# Altium PCB shieldMegaEstacionTT.PcbDoc
Units mil, origin at the board's own origin, x right, y up, seen from the top; angles counter-clockwise.
Board outline 3937 x 4724 mil, 2 copper layers (Top Layer, Bottom Layer); 68 components, 76 nets, 317 pads, 48 vias.
Unrouted connection lines stored in the file: 2.
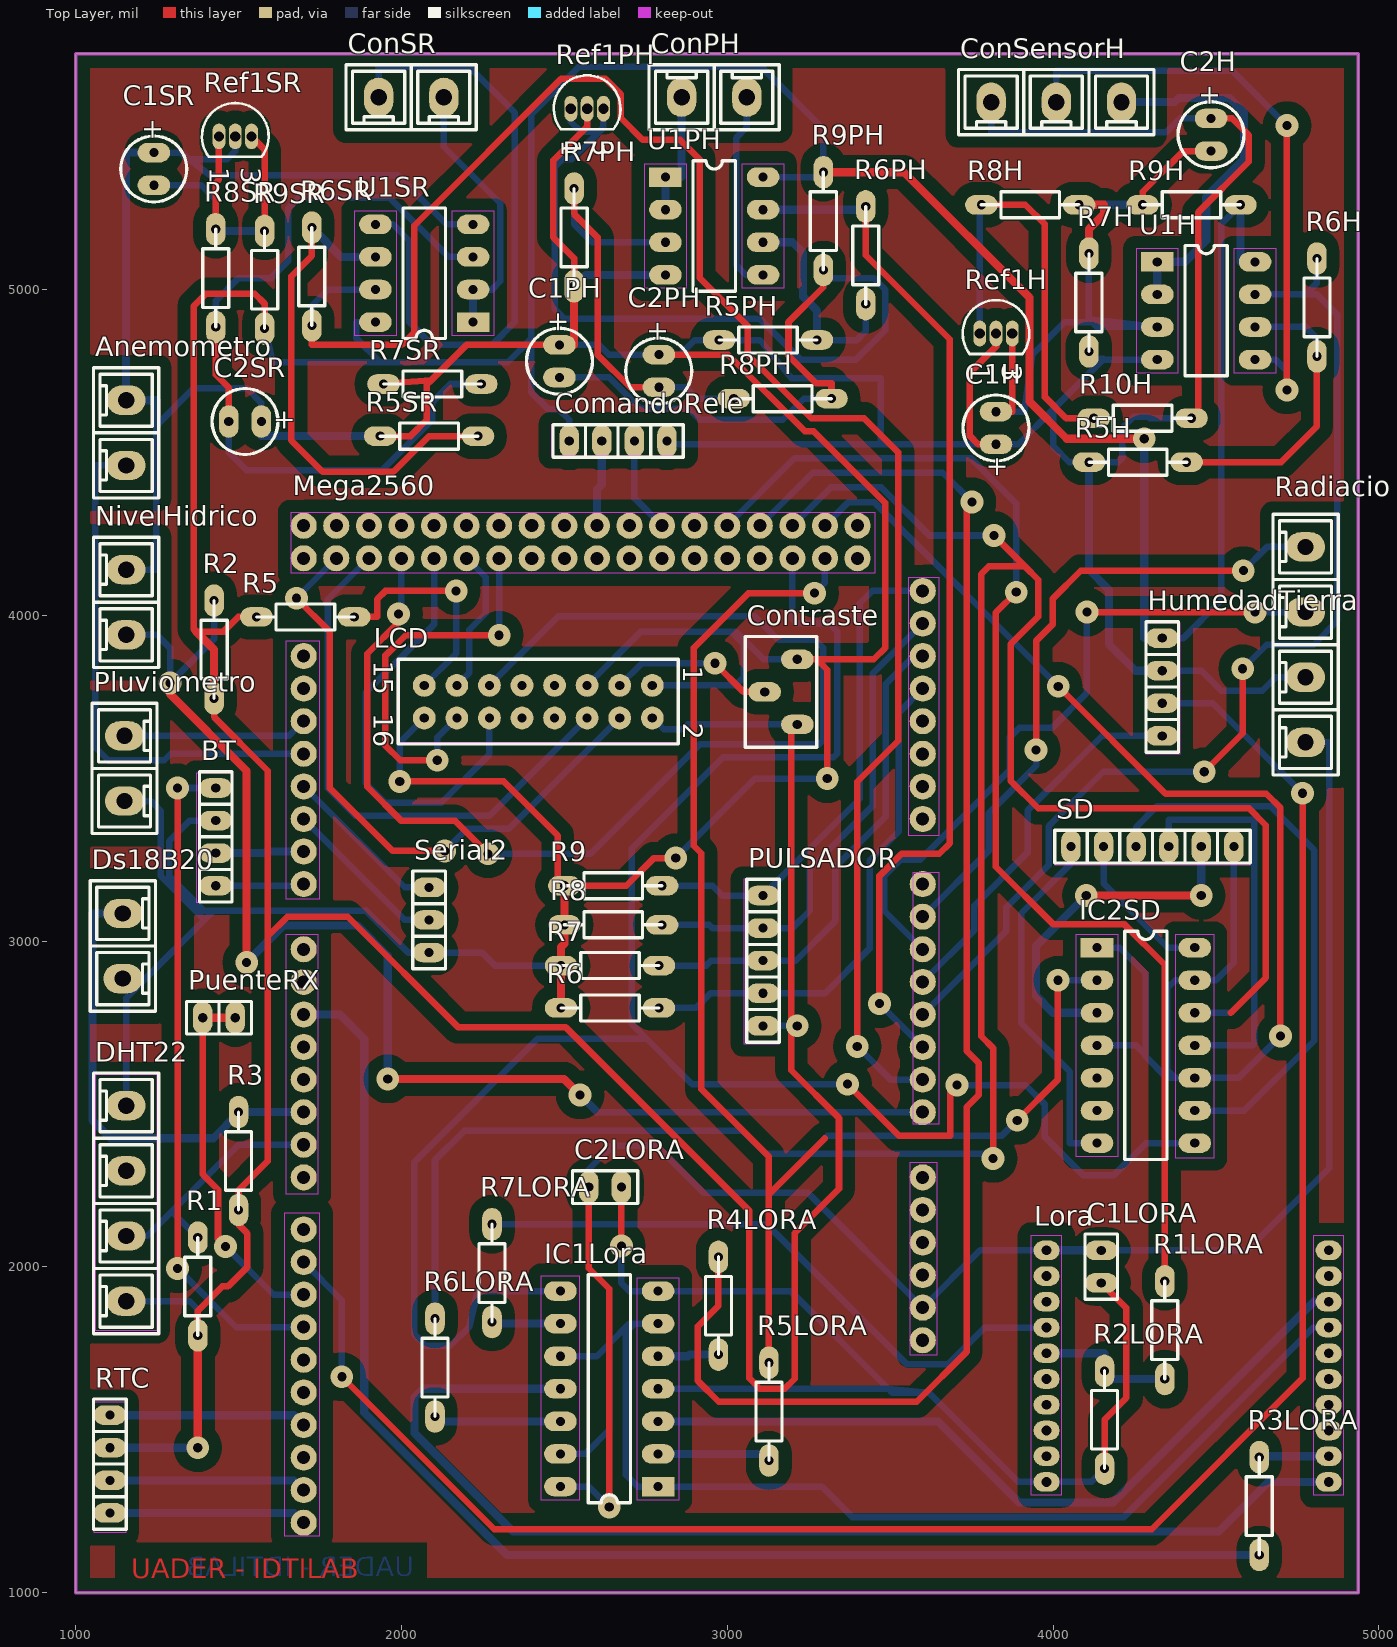
[diagram p0: Top Layer view]
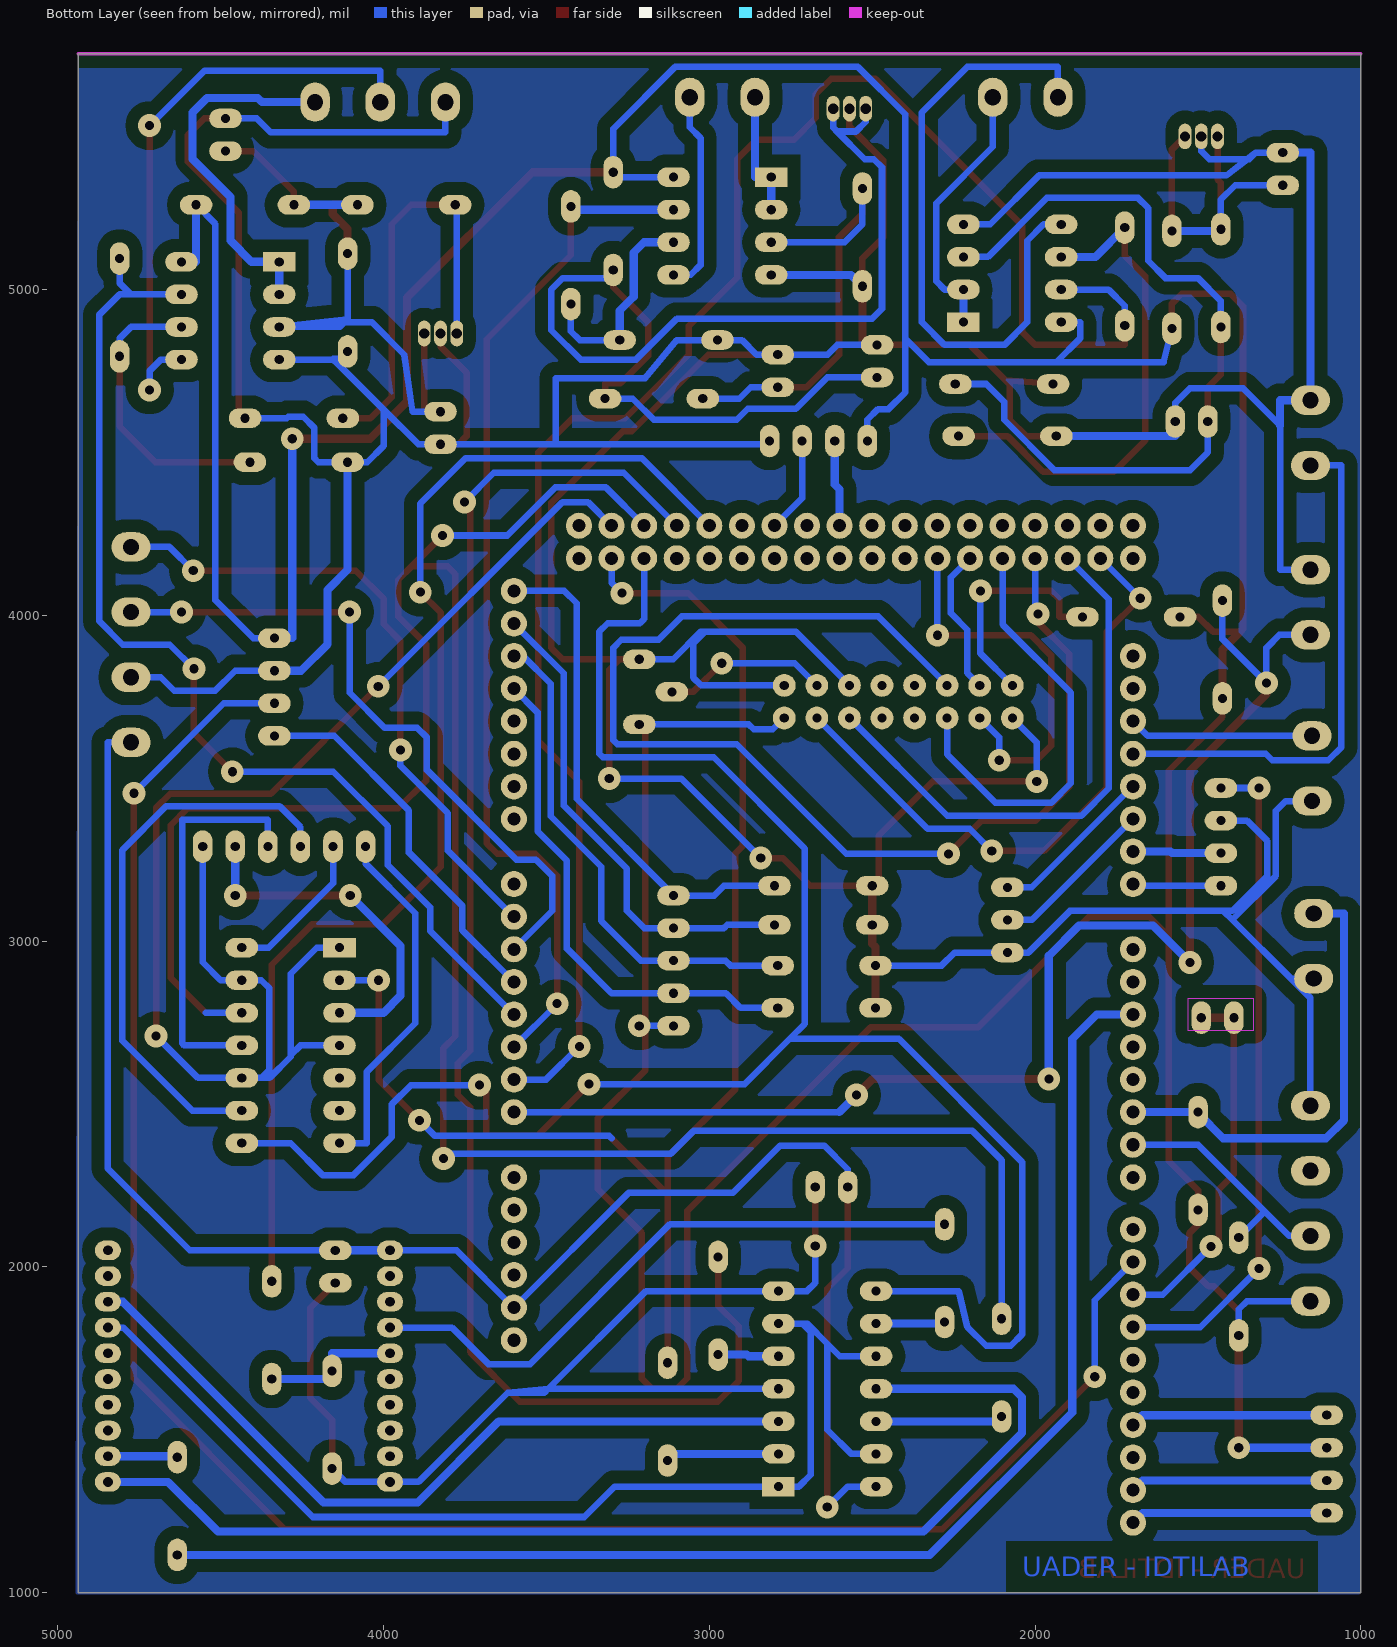
[diagram p1: Bottom Layer view, seen from below]

## Layer stack, top to bottom
Top Solder: solder mask 0.4, Solder Resist, Dk 3.5
Top Layer: signal copper 1.4
Dielectric 1: dielectric 12.6, FR-4, Dk 4.8
Bottom Layer: signal copper 1.4
Bottom Solder: solder mask 0.4, Solder Resist, Dk 3.5

## Board outline
1000,1000 1000,5724 4937,5724 4937,1000

## Design rules (kind name [scope] priority, off if disabled: settings)
Clearance [All] p1: gap=20
PolygonConnect [All] p1: connectstyle=Relief reliefconductorwidth=10 reliefentries=4 polygonreliefangle="90 Angle" airgapwidth=10
RoomDefinition SensorRadiacion [InComponentClass('SensorRadiacion')] p1: confinementstyle=ConfineIn formatcopy=TRUE lockcomponents=FALSE outline 4937,1000 4937,5730 1000,5730 1000,1000
RoomDefinition SensorPH [InComponentClass('SensorPH')] p2: confinementstyle=ConfineIn formatcopy=TRUE lockcomponents=FALSE outline 990,5740 990,980 4960,980 4960,5740
RoomDefinition SensorHumedadBueno [InComponentClass('SensorHumedadBueno')] p3: confinementstyle=ConfineIn formatcopy=TRUE lockcomponents=FALSE outline 4960,1000 4960,5735 970,5735 970,1000
RoomDefinition SD [InComponentClass('SD')] p4: confinementstyle=ConfineIn formatcopy=TRUE lockcomponents=FALSE outline 4960,1000 4960,5724 980,5724 980,1000
RoomDefinition LORA [InComponentClass('LORA')] p5: confinementstyle=ConfineIn formatcopy=TRUE lockcomponents=FALSE outline 980,986 4937,986 4937,5715 980,5715
RoomDefinition shieldMegaEstacionTT [InComponentClass('shieldMegaEstacionTT')] p6: confinementstyle=ConfineIn formatcopy=TRUE lockcomponents=FALSE outline 990,1010 4950,1010 4950,5735 990,5735
RoutingVias [All] p1: holewidth=28 width=70 viastyle="Through Hole" minholewidth=28 minwidth=70 maxholewidth=28 maxwidth=70
SolderMaskExpansion [All] p1: expansion=4
Width [All] p1: maxlimit=60 minlimit=20 preferedwidth=20 minimp=50.000000 maximp=50.000000 favimp=50.000000 checkconnectedcopper=TRUE
30 further rules are at their usual default settings.

## Classes and differential pairs
component class SensorRadiacion: C1SR C2SR ConSR R5SR R6SR R7SR R8SR R9SR Ref1SR U1SR
component class SensorPH: C1PH C2PH ConPH R5PH R6PH R7PH R8PH R9PH Ref1PH U1PH
component class SensorHumedadBueno: C1H C2H ConSensorH R5H R6H R7H R8H R9H R10H Ref1H U1H
component class SD: IC2SD SD
component class LORA: C1LORA C2LORA IC1Lora Lora R1LORA R2LORA R3LORA R4LORA R5LORA R6LORA R7LORA
component class shieldMegaEstacionTT: Anemometro BT ComandoRele Contraste DHT22 Ds18B20 HumedadTierra LCD Mega2560 NivelHidrico Pluviometro PuenteRX PULSADOR R1 R2 R3 R5 R6 R7 R8 R9 RadiacionViejo RTC Serial2

## Components (designator, comment, footprint, x,y, rotation, side; value= is the part's Value field where it differs from the comment)
Anemometro "Int5" "BORNERA2 - T" 1155,4460 r90 top
BT "CON4" CON4 1430,3470 r270 top
C1H "1uF" CAPPOL100 3825,4525 r90 top
C1LORA "0,1uF" CAP100 4148,1951 r90 top
C1PH "1uF" CAPPOL100 2485,4830 r270 top
C1SR "1uF" CAPPOL100 1240,5420 r270 top
C2H "1uF" CAPPOL100 4485,5525 r270 top
C2LORA "0,1uF" CAP100 2675,2245 r180 top
C2PH "1uF" CAPPOL100 2790,4800 r270 top
C2SR "1uF" CAPPOL100 1570,4595 r180 top
ComandoRele "CON4" CON4 2515,4535 r0 top
ConPH "CON2" "BORNERA2 - T" 2860,5590 r0 top
ConSensorH "CON3" "BORNERA3 - T" 4210,5575 r180 top
ConSR "CON2" "BORNERA2 - T" 2130,5590 r180 top
Contraste "POT" PRESET2 3215,3665 r90 top
DHT22 "Vcc-D-n-Gnd" BORNERA4 1155,1895 r90 top
Ds18B20 "CON2" "BORNERA2 - T" 1145,3085 r270 top
HumedadTierra "A-D-Gnd-Vcc" CON4 4335,3630 r90 top
IC1Lora "74HC125" DIP14B 2788,1326 r180 top
IC2SD "74HC125" DIP14B 4135,2980 r0 top
LCD "CON16" CON2X8 2770,3785 r270 top
Lora "LORA BEE" LORABEE 4413,1656 r0 top
Mega2560 "Shield MEGA" "Shield Mega" 6700,475 r90 top
NivelHidrico "A0" "BORNERA2 - T" 1155,3940 r90 top
Pluviometro "Int4" "BORNERA2 - T" 1150,3630 r270 top
PuenteRX "CON2" CON2 1490,2765 r180 top
PULSADOR "CON5" CON5 3110,3140 r270 top
R1 "10K" RES300 1375,1790 r90 top
R1LORA "1K" RES300 4343,1656 r90 top
R2 "220" RES300 1425,3745 r90 top
R2LORA "2k2" RES300 4158,1381 r90 top
R3 "4k7" RES300 1500,2175 r90 top
R3LORA "3k3" RES300 4633,1416 r270 top
R4LORA "3k3" RES300 2973,1731 r90 top
R5 "680" RES300 1555,3995 r0 top
R5H "10K" RES300 4110,4470 r0 top
R5LORA "3k3" RES300 3128,1406 r90 top
R5PH "10K" RES300 2975,4845 r0 top
R5SR "10K" RES300 1935,4550 r0 top
R6 "10K" RES300 2490,2795 r0 top
R6H "22K" RES300 4810,5095 r270 top
R6LORA "3k3" RES300 2103,1841 r270 top
R6PH "22K" RES300 3425,5255 r270 top
R6SR "22K" RES300 1725,4890 r90 top
R7 "10K" RES300 2490,2925 r0 top
R7H "10K" RES300 4110,4810 r90 top
R7LORA "3k3" RES300 2278,1831 r90 top
R7PH "10K" RES300 2530,5010 r90 top
R7SR "10K" RES300 1945,4710 r0 top
R8 "10K" RES300 2500,3050 r0 top
R8H "1K" RES300 3780,5260 r0 top
R8PH "10K" RES300 3020,4665 r0 top
R8SR "10K" RES300 1430,4885 r90 top
R9 "10K" RES300 2500,3170 r0 top
R9H "1K" RES300 4275,5260 r0 top
R9PH "1K" RES300 3295,5060 r90 top
R9SR "1K" RES300 1580,5180 r270 top
R10H "2K2" RES300 4425,4605 r180 top
RadiacionViejo "CON4" "BORNERA4 - T" 4775,3610 r90 top
Ref1H "TL431ACLP" LP03 3825,4865 r270 top
Ref1PH "TL431ACLP" LP03 2570,5555 r270 top
Ref1SR "TL431ACLP" LP03 1490,5470 r270 top
RTC "Scl-Sda-Vcc-Gnd" CON4 1105,1245 r90 top
SD "Gnd-Vcc-Miso-Mosi-Sck-Cs" CON6 4055,3290 r0 top
Serial2 "CON3" CON3 2085,3165 r270 top
U1H "MCP6002-E/P" DIP8B 4320,5085 r0 top
U1PH "MCP6002-E/P" DIP8B 2810,5345 r0 top
U1SR "MCP6002-E/P" DIP8B 2220,4900 r180 top

## Footprints (in the part's own frame and the unit in brackets; to place one, negate y for a bottom-side part, rotate by r counter-clockwise, add the part's x,y. Pads: shape width x height; smd on the part's side, far side on the other; paste and mask are expansions set on the pad)
"BORNERA2 - T" [mil] "Top Layer bloqueada"
  oval 90x120 hole 50: 1(0,0) 2(200,0)
  Top Layer keep-out region: -100,-100 300,-100 300,100 -100,100
  silkscreen extent -100,-100 300,100
"BORNERA3 - T" [mil] "Top layer bloqueada"
  oval 90x120 hole 50: 1(0,0) 2(200,0) 3(400,0)
  Top Layer keep-out region: -100,-100 500,-100 500,100 -100,100
  silkscreen extent -100,-100 500,100
BORNERA4 [mil]
  oval 90x120 hole 50: 1(0,0) 2(200,0) 3(400,0) 4(600,0)
  silkscreen extent -100,-100 700,100
"BORNERA4 - T" [mil] "Top layer bloqueada"
  oval 90x120 hole 50: 1(0,0) 2(200,0) 3(400,0) 4(600,0)
  Top Layer keep-out region: -100,-100 700,-100 700,100 -100,100
  silkscreen extent -100,-100 700,100
CAP100 [mil]
  oval 60x100 hole 28: 1(0,0) 2(100,0)
  silkscreen extent -50,-50 150,50
CAPPOL100 [mil]
  oval 60x100 hole 28: 1(0,0) 2(100,0)
  silkscreen extent -51,-101 151,101
CON2 [mil]
  oval 60x100 hole 28: 1(0,0) 2(100,0)
  silkscreen extent -50,-50 150,50
CON2X8 [mil]
  round 70 hole 28: 1(0,0) 2(100,0) 3(0,-100) 4(100,-100) 5(0,-200) 6(100,-200) 7(0,-300) 8(100,-300) 9(0,-400) 10(100,-400) 11(0,-500) 12(100,-500) 13(0,-600) 14(100,-600) 15(0,-700) 16(100,-700)
  silkscreen extent -80,-780 180,80
CON3 [mil]
  oval 60x100 hole 28: 1(0,0) 2(100,0) 3(200,0)
  silkscreen extent -50,-50 250,50
CON4 [mil]
  oval 60x100 hole 28: 1(0,0) 2(100,0) 3(200,0) 4(300,0)
  silkscreen extent -50,-50 350,50
CON5 [mil]
  oval 60x100 hole 28: 1(0,0) 2(100,0) 3(200,0) 4(300,0) 5(400,0)
  silkscreen extent -50,-50 450,50
CON6 [mil]
  oval 60x100 hole 28: 1(0,0) 2(100,0) 3(200,0) 4(300,0) 5(400,0) 6(500,0)
  silkscreen extent -50,-50 550,50
DIP8B [mil] "Top layer bloqueada"
  rect 100x60 hole 28: 1(0,0)
  oval 100x60 hole 28: 2(0,-100) 3(0,-200) 4(0,-300) 5(300,-300) 6(300,-200) 7(300,-100) 8(300,0)
  Top Layer keep-out region: -65,-340 65,-340 65,40 -65,40
  Top Layer keep-out region: 235,-340 365,-340 365,40 235,40
  silkscreen extent 85,-350 215,50
DIP14B [mil] "DIP14 con top layer bloqueado"
  rect 100x60 hole 28: 1(0,0)
  oval 100x60 hole 28: 2(0,-100) 3(0,-200) 4(0,-300) 5(0,-400) 6(0,-500) 7(0,-600) 8(300,-600) 9(300,-500) 10(300,-400) 11(300,-300) 12(300,-200) 13(300,-100) 14(300,0)
  Top Layer keep-out region: -65,-640 65,-640 65,40 -65,40
  Top Layer keep-out region: 240,-645 360,-645 360,40 240,40
  silkscreen extent 85,-650 215,50
LORABEE [mil] "Top Layer Bloqueada"
  oval 80x60 hole 30: 1(-433,395) 2(-433,316) 3(-433,237) 4(-433,158) 5(-433,79) 6(-433,0) 7(-433,-79) 8(-433,-158) 9(-433,-237) 10(-433,-316) 11(433,-316) 12(433,-237) 13(433,-158) 14(433,-79) 15(433,0) 16(433,79) 17(433,158) 18(433,237) 19(433,316) 20(433,395)
  Top Layer keep-out region: 385,-355 480,-355 480,440 385,440
  Top Layer keep-out region: -481,-355 -386,-355 -386,440 -481,440
LP03 [mm] "TO, Flat Index; 3 In-Line, Axial Leads; Body Dia. 4.8mm; Leads 0.56 x 0.41 mm (max)"
  oval 2x1 hole 0.8: 1(0,-1.27) 2(0,0) 3(0,1.27)
  silkscreen extent -2.6,-2.6 1.6,2.6
PRESET2 [mil]
  oval 60x100 hole 28: 1(0,0) 2(200,0) 3(100,100)
  silkscreen extent -70,-60 270,160
RES300 [mil]
  oval 100x60 hole 28: 1(0,0) 2(300,0)
  silkscreen extent 0,-40 300,40
"Shield Mega" [mil]
  round 80 hole 40: 0(2500,5000) 1(2400,5000) 2(2300,5000) 3(2200,5000) 3V3(1400,3100) 4(2100,5000) 5(2000,5000) 5V(1500,3100) 6(1900,5000) 7(1800,5000) 8(1640,5000) 9(1540,5000) 10(1440,5000) 11(1340,5000) 12(1240,5000) 13(1140,5000) 14(2700,5000) 15(2800,5000) 16(2900,5000) 17(3000,5000) 18(3100,5000) 19(3200,5000) 20(3300,5000) 21(3400,5000) 22(3700,4900) 23(3800,4900) 24(3700,4800) 25(3800,4800) 26(3700,4700) 27(3800,4700) 28(3700,4600) 29(3800,4600) 30(3700,4500) 31(3800,4500) 32(3700,4400) 33(3800,4400) 34(3700,4300) 35(3800,4300) 36(3700,4200) 37(3800,4200) 38(3700,4100) 39(3800,4100) 40(3700,4000) 41(3800,4000) 42(3700,3900) 43(3800,3900) 44(3700,3800) 45(3800,3800) 46(3700,3700) 47(3800,3700) 48(3700,3600) 49(3800,3600) 50(3700,3500) 51(3800,3500) 52(3700,3400) 53(3800,3400) A0(2000,3100) A1(2100,3100) A2(2200,3100) A3(2300,3100) A4(2400,3100) A5(2500,3100) A6(2600,3100) A7(2700,3100) A8(2900,3100) A9(3000,3100) A10(3100,3100) A11(3200,3100) A12(3300,3100) A13(3400,3100) A14(3500,3100) A15(3600,3100) AREF(940,5000) GNDa(3700,3300) GNDb(3800,3300) GNDc(1600,3100) GNDd(1700,3100) GNDs(1040,5000) RESET(1300,3100) SCL(740,5000) SDA(840,5000) VCCa(3700,5000) VCCb(3800,5000) VIN(1800,3100)

## Part data
Anemometro NivelHidrico Pluviometro: library part CON2, "Conector 2"
BT ComandoRele RadiacionViejo: "Conector 4"
C1H C1LORA C1PH C1SR C2H C2LORA C2PH C2SR: library part CAP, "Capacitor"
ConPH ConSR Ds18B20 PuenteRX: "Conector 2"
ConSensorH Serial2: "Conector 3"
Contraste: "Potenciometro - Preset"
DHT22 HumedadTierra RTC: library part CON4, "Conector 4"
LCD: "Conector 16"
PULSADOR: "Conector 5"
R1 R1LORA R2 R2LORA R3 R3LORA R4LORA R5 R5H R5LORA R5PH R5SR R6 R6H R6LORA R6PH R6SR R7 R7H R7LORA R7PH R7SR R8 R8H R8PH R8SR R9 R9H R9PH R9SR R10H: library part RES, "Resistencia"
Ref1H Ref1PH Ref1SR: "Adjustable Precision Shunt Regulator"
SD: library part CON6, "Conector 6"
U1H U1PH U1SR: "1 MHz, Low-Power Operational Amplifier, 8-Pin PDIP, Extended Temperature"

## Via types
v1: diameter 70, hole 28, Top Layer to Bottom Layer, 48 vias

## Nets (pads, with @x,y where several pads share a name; then routed paths per layer and width w, separated by ;. In a path a pad name is that pad's centre, name@x,y a point inside that pad or via, vN(x,y) a via of type N, cw(c..) or ccw(c..) an arc to the next point about the centre after c; other vN are vias at no path point)
3V3: C1LORA.2 C2LORA.2 IC1Lora.14 Lora.1 Mega2560.3V3 RadiacionViejo.1 | length 5303.6
  Top Layer w20: C2LORA.2 2575,1996 2638,1933 v1(2638,1263)
  Bottom Layer w20: IC1Lora.14 2575,1326 v1(2638,1263) ; C2LORA.2 2575,2300 2647.5,2372.5 2782.5,2372.5 2928,2227 3248,2227 Mega2560.3V3 3776,2051 Lora.1 ; C1LORA.2 4595,2051 4847,2303 4847,3610 RadiacionViejo.1
  Bottom Layer w25: Lora.1 C1LORA.2
GND: C1LORA.1 C2LORA.1 IC1Lora.4 IC1Lora.7 Lora.10 R2LORA.1 | length 3508.3
  Top Layer w20: v1(2675,2064) C2LORA.1 ; C1LORA.1 4225,1874 4225,1598 4158,1531 R2LORA.1
  Bottom Layer w20: v1(2675,2064) 2675,1951 2700,1926 IC1Lora.7 3194,1926 3494,1626 ; IC1Lora.4 3494,1626 ; R2LORA.1 4117,1340 Lora.10 3893,1340 3619,1614 ; 3494,1626 3506,1614 3619,1614 ; 3494,1626 3619,1614
NetAnemometro_1: Anemometro.1 Mega2560.18 | length 1624.9
  Bottom Layer w20: Anemometro.1 1060,4460 1060,3595 1100,3555 1272,3555 1292,3575 Mega2560.18
NetBT_1: BT.1 Mega2560.11 | length 2053.6
  Top Layer w20: v1(1313,1995) v1(1313,3470)
  Bottom Layer w20: v1(1313,1995) 1493,1815 Mega2560.11 ; v1(1313,3470) BT.1
NetBT_3: BT.3 Mega2560.15 | length 272.1
  Bottom Layer w25: BT.3 1580,3270 1585,3275 Mega2560.15
NetBT_4: BT.4 Mega2560.14 | length 272.1
  Bottom Layer w20: BT.4 1695,3170 Mega2560.14
NetC1H_2: C1H.2 C2H.2 R7H.2 R8H.2 R9H.1 Ref1H.3 U1H.3 | length 2151.3
  Top Layer w20: C1H.2 3875,4625 Ref1H.3 ; R9H.1 4275,5300 4400,5425 C2H.2
  Top Layer w25: R8H.2 4156,5260 4156,5232 4110,5186 R7H.2
  Bottom Layer w20: C1H.2 3911,4625 3936,4800 4036,4900 4119,4900 ; R7H.2 4110,4909 ; 4110,4909 4119,4900 ; 4110,4909 U1H.3 4134,4885 4119,4900
  Bottom Layer w25: R8H.2 R9H.1
NetC1PH_2: C1PH.2 R8PH.2 R9PH.1 Ref1PH.1 Ref1PH.3 | length 3741.8
  Top Layer w20: R9PH.1 3295,5007 3188,4900 3188,4797 3272.77,4712.23 3320,4712.23 R8PH.2
  Bottom Layer w20: C1PH.2 2638,4730 2734,4634 2882,4634 2916,4600 3170,4600 3235,4665 R8PH.2 ; Ref1PH.1 2520,5515 2550,5485 2608,5485 ; Ref1PH.3 2620,5497 2608,5485 ; R9PH.1 3295,5035 3450,5035 3485,5000 3485,4875 3395,4785 3225,4785 3099,4911 2500,4911 2470,4941 2470,5375 2495,5400 2523,5400 2608,5485
NetC1SR_2: C1SR.2 R8SR.2 R9SR.1 Ref1SR.1 Ref1SR.3 | length 1049.9
  Top Layer w20: R8SR.2 1430,5328 1440,5338 Ref1SR.1 ; Ref1SR.3 1580,5430 R9SR.1
  Bottom Layer w20: C1SR.2 1386,5320 1430,5276 R8SR.2
  Bottom Layer w25: R8SR.2 1430,5180 R9SR.1
NetC2PH_2: C2PH.2 R7PH.2 R8PH.1 U1PH.3 | length 1426.5
  Top Layer w20: R7PH.2 2530,5232 2602,5160 2602,4800 2702,4700 C2PH.2
  Bottom Layer w20: R7PH.2 2530,5200 2585,5145 U1PH.3 ; C2PH.2 2873,4700 2908,4665 R8PH.1
NetC2SR_2: C2SR.2 R7SR.2 R8SR.1 U1SR.3 | length 2511.3
  Top Layer w20: R8SR.1 1430,4739 1470,4699 C2SR.2
  Bottom Layer w20: R8SR.1 1430,4965 1500,5035 1600,5035 1653,5088 1653,5250 1684,5281 1964,5281 2145,5100 U1SR.3 ; C2SR.2 1470,4500 1524,4446 1941,4446 2095,4600 2095,4655 2150,4710 R7SR.2
NetComandoRele_2: ComandoRele.2 Mega2560.39 | length 266.2
  Bottom Layer w25: Mega2560.39 2600,4387 2615,4402 ComandoRele.2
NetComandoRele_3: ComandoRele.3 Mega2560.43 | length 295.2
  Bottom Layer w20: ComandoRele.3 2715,4360 Mega2560.43
NetConPH_1: ConPH.1 U1PH.1 U1PH.2 | length 395
  Bottom Layer w25: U1PH.2 U1PH.1 2860,5345 ConPH.1
NetConPH_2: ConPH.2 U1PH.5 | length 624.1
  Bottom Layer w20: ConPH.2 3060,5498 3027,5465 3027,5075 3057,5045 U1PH.5
NetConSensorH_1: ConSensorH.1 U1H.1 U1H.2 | length 1117.6
  Bottom Layer w25: ConSensorH.1 4373.5,5575 4386,5587.5 4541.5,5587.5 4586,5543 4586,5400 4470,5284 4470,5150 4405,5085 U1H.1 U1H.2
NetConSensorH_2: ConSensorH.2 U1H.5 | length 1856.5
  Top Layer w20: v1(4718,4692) v1(4718,5503)
  Bottom Layer w20: ConSensorH.2 4010,5672 4549,5672 v1(4718,5503) ; U1H.5 4683,4785 4718,4750 v1(4718,4692)
NetConSR_1: ConSR.1 U1SR.1 U1SR.2 | length 830
  Bottom Layer w20: ConSR.1 2130,5438 2303,5265 2303,5025 2278,5000 U1SR.2
  Bottom Layer w25: U1SR.1 U1SR.2
NetConSR_2: ConSR.2 U1SR.5 | length 1968.7
  Bottom Layer w20: U1SR.5 1974,5200 2024,5150 2024,4900 2094,4830 2278,4830 2348,4900 2348,5543 2208,5683 1930,5683 ConSR.2
NetContraste_3: Contraste.3 LCD.3 | length 509.6
  Top Layer w20: v1(2962,3853) 3050,3765 Contraste.3
  Bottom Layer w20: LCD.3 2738,3853 v1(2962,3853)
NetDHT22_2: DHT22.2 Mega2560.6 R1.2 | length 774.1
  Bottom Layer w20: DHT22.2 1220,2095 1295,2170 ; R1.2 1295,2170 ; Mega2560.6 1500,2375 1295,2170
NetDs18B20_1: Ds18B20.1 Mega2560.5 R3.2 | length 1433.7
  Bottom Layer w25: Ds18B20.1 1052,3085 1052,2450 1107,2395 1423,2395 1500,2472 R3.2 Mega2560.5
NetHumedadTierra_1: HumedadTierra.1 Mega2560.A4 | length 1167.1
  Bottom Layer w20: Mega2560.A4 3757.86,3032.86 3757.86,3107.86 3921.96,3271.96 3921.96,3400.72 4151.24,3630 HumedadTierra.1
NetHumedadTierra_2: HumedadTierra.2 Mega2560.9 | length 6076.4
  Top Layer w20: v1(1817,1663) 2285,1195 4303,1195 4766,1658 v1(4766,3454)
  Bottom Layer w20: Mega2560.9 1817,1898 v1(1817,1663) ; HumedadTierra.2 4490,3730 v1(4766,3454)
NetIC1Lora_1: IC1Lora.1 IC1Lora.6 IC1Lora.10 IC1Lora.13 Lora.17 | length 3712.3
  Bottom Layer w20: IC1Lora.13 2564,1426 2638,1500 2638,1764 ; IC1Lora.10 2600,1726 2638,1764 ; IC1Lora.6 2715,1826 ; Lora.17 4799,1814 4217.5,1232.5 3384,1232.5 3290.5,1326 IC1Lora.1 2725,1326 2689,1362 2689,1800 2715,1826 ; 2638,1764 2700,1826 2715,1826
NetIC1Lora_2: IC1Lora.2 R5LORA.1 | length 360
  Bottom Layer w25: IC1Lora.2 3128,1426 R5LORA.1
NetIC1Lora_3: IC1Lora.3 Lora.18 | length 2415.9
  Bottom Layer w25: IC1Lora.3 3646.5,1526 3895,1277.5 4184.5,1277.5 4800,1893 Lora.18
NetIC1Lora_5: IC1Lora.5 R4LORA.1 | length 187.1
  Bottom Layer w25: IC1Lora.5 2880,1726 2885,1731 R4LORA.1
NetIC1Lora_8: IC1Lora.8 IC2SD.8 Mega2560.50 | length 6203.7
  Top Layer w20: v1(3369,2561) 3528,2402 3684,2402 3684,2537 v1(3705,2558)
  Bottom Layer w20: IC1Lora.8 2234,1926 2208,1816 2150,1758 2075,1758 2040,1793 2040,2322 2418,2700 2753,2700 ; Mega2560.50 3200,3989 3213,3976 3311.5,3976 3337.5,3950 3337.5,3575 3326.5,3564 2986.74,3564 2707,3284.26 2707,2746 2753,2700 ; v1(3369,2561) 2892,2561 2753,2700 ; v1(3705,2558) 3916,2558 3974,2500 3974,2400 4092,2282 4187,2282 4285,2380 IC2SD.8
NetIC1Lora_9: IC1Lora.9 R7LORA.1 | length 215
  Bottom Layer w25: R7LORA.1 2278,1826 IC1Lora.9
NetIC1Lora_11: IC1Lora.11 Lora.11 | length 3563.2
  Bottom Layer w25: IC1Lora.11 2066,1626 2040,1600 2040,1490 2342.5,1187.5 4508.5,1187.5 4661,1340 Lora.11
NetIC1Lora_12: IC1Lora.12 R6LORA.2 | length 400
  Bottom Layer w25: R6LORA.2 2103,1526 IC1Lora.12
NetIC2SD_1: IC2SD.1 IC2SD.4 IC2SD.10 IC2SD.13 Mega2560.53 SD.6 | length 4489.4
  Top Layer w20: v1(4016,3782) 4345.5,3452.5 4654.5,3452.5 4698,3409 v1(4698,2708.69)
  Bottom Layer w20: Mega2560.53 3372.5,4347.5 3450.5,4347.5 v1(4016,3782) ; IC2SD.4 4255,2680 4285,2650 ; IC2SD.1 4205,2980 4285,2900 4285,2650 ; SD.6 4555,2935 4500,2880 IC2SD.13 4375,2880 4350,2855 4350,2605 4375,2580 ; v1(4698,2708.69) 4569.31,2580 IC2SD.10 4375,2580 ; 4285,2650 4285,2645 4350,2580 4375,2580
NetIC2SD_2: IC2SD.2 Mega2560.52 R5LORA.2 | length 4308.3
  Top Layer w20: R5LORA.2 3128,2223 ; v1(3268,4068) 3065,4068 2897,3900 2897,3293 2920,3270 2920,2546 3128,2338 3128,2223 ; 3300,2395 3128,2223 ; v1(3890,2450) 4015,2575 v1(4015,2880)
  Bottom Layer w20: v1(3268,4068) 3300,4100 Mega2560.52 ; 3300,2395 3307,2402 3842,2402 v1(3890,2450) ; v1(4015,2880) IC2SD.2
NetIC2SD_3: IC2SD.3 SD.5 | length 1083.7
  Top Layer w25: v1(4102,3140) v1(4455,3140)
  Bottom Layer w25: v1(4102,3140) 3947.5,2985.5 3947.5,2832.5 4000,2780 IC2SD.3 ; v1(4455,3140) SD.5
NetIC2SD_9: IC2SD.9 SD.3 | length 1729.5
  Bottom Layer w20: SD.3 4255,3350 4319.43,3414.43 4666.57,3414.43 4801.5,3279.5 4801.5,2694.31 4587.19,2480 IC2SD.9
NetIC2SD_11: IC2SD.11 SD.4 | length 1218.5
  Bottom Layer w20: SD.4 4355,3373 4618,3373 4618,2686 4612,2680 IC2SD.11
NetIC2SD_12: IC2SD.12 Mega2560.51 R6LORA.1 | length 7368.9
  Top Layer w20: v1(3816,2333) 3816,2671.87 3779.5,2708.37 3779.5,4126.5 3803,4150 3914,4150 ; v1(3819,4245) 3914,4150 ; 4546,2780 4653,2887 4653,3356 4601.5,3407.5 3954.5,3407.5 3869.5,3492.5 3869.5,3911 3954.5,3996 3954.5,4109.5 3914,4150
  Bottom Layer w20: R6LORA.1 2103,2328 2192.5,2417.5 3048.5,2417.5 3118,2348 3801,2348 v1(3816,2333) ; Mega2560.51 3317.5,4392.5 3473,4392.5 3620.5,4245 v1(3819,4245) ; IC2SD.12 4546,2780
NetLCD_4: LCD.4 Mega2560.22 | length 1937.1
  Top Layer w20: v1(1677.5,4052.5) 1780,3950 1780,3470 1973,3277 v1(2133,3277)
  Bottom Layer w20: v1(1677.5,4052.5) Mega2560.22 ; v1(2133,3277) 2201,3345 2330,3345 LCD.4
NetLCD_6: LCD.6 Mega2560.24 | length 1713.2
  Bottom Layer w20: Mega2560.24 1774,4049 1774,3469 1858,3385 2270,3385 LCD.6
NetLCD_11: LCD.11 Mega2560.26 | length 3810.4
  Top Layer w20: v1(1991,4004) 1991,3978 1895,3882 1895,3474 2000,3369 2165,3369 v1(2266,3268)
  Bottom Layer w20: v1(1991,4004) 2000,4013 Mega2560.26 ; v1(2266,3268) 2580,3268 2916,3604 3282,3604 3295,3617 3295,3900 3270,3925 3156,3925 3084,3997 2482,3997 LCD.11
NetLCD_12: LCD.12 Mega2560.28 | length 1354.5
  Bottom Layer w20: Mega2560.28 2100,3972 1890.72,3762.72 1890.72,3484.28 1950,3425 2122,3425 2270,3573 LCD.12
NetLCD_13: LCD.13 Mega2560.30 | length 450.9
  Bottom Layer w20: LCD.13 2208,3823 2208,3955.87 2258.51,4006.38 2258.51,4116.49 Mega2560.30
NetLCD_14: LCD.14 Mega2560.32 | length 1220.1
  Top Layer w20: v1(2110,3555) 1996.03,3555 1951.03,3600 1951.03,3877.03 2013,3939 v1(2300,3939)
  Bottom Layer w20: v1(2110,3555) 2110,3625 LCD.14 ; v1(2300,3939) Mega2560.32
NetLCD_15: LCD.15 R5.2 | length 708.9
  Top Layer w20: R5.2 1926,3995 1926,4050 1951,4075 v1(2168,4075)
  Bottom Layer w20: LCD.15 2168,3883 v1(2168,4075)
NetLora_4: Lora.4 R7LORA.2 | length 1926.8
  Bottom Layer w20: R7LORA.2 2278,2131.5 3120.5,2131.5 3550,1702 3678,1702 3790,1814 Lora.4
NetLora_5: Lora.5 R1LORA.1 R2LORA.2 | length 442
  Bottom Layer w25: Lora.5 4158,1735 R2LORA.2 4158,1656 R1LORA.1
NetLora_12: Lora.12 R3LORA.1 | length 216
  Bottom Layer w25: R3LORA.1 4633,1419 Lora.12
NetMega2560_2: Mega2560.2 R3LORA.2 | length 4291.7
  Bottom Layer w25: Mega2560.2 1811,2775 1886,2700 1886,1553.64 2323.64,1116 R3LORA.2
NetMega2560_10: Mega2560.10 PuenteRX.1 PuenteRX.2 | length 1132.3
  Top Layer w20: PuenteRX.2 1390,2284 1437,2237 1437,2086 v1(1460,2063)
  Top Layer w25: PuenteRX.2 PuenteRX.1
  Bottom Layer w20: v1(1460,2063) 1608,1915 Mega2560.10
NetMega2560_16: Mega2560.16 Serial2.2 | length 513.4
  Bottom Layer w20: Mega2560.16 2010,3065 Serial2.2
NetMega2560_17: Mega2560.17 Serial2.1 | length 513.4
  Bottom Layer w20: Mega2560.17 2010,3165 Serial2.1
NetMega2560_19: Mega2560.19 Pluviometro.1 | length 568.6
  Bottom Layer w20: Pluviometro.1 1655,3630 Mega2560.19
NetMega2560_47: Mega2560.47 R1LORA.2 | length 3786.1
  Top Layer w20: v1(3887,4071) 3824.5,4008.5 3824.5,3228 4000,3052.5 4218,3052.5 4343,2927.5 R1LORA.2
  Bottom Layer w20: Mega2560.47 3207.5,4482.5 3747.5,4482.5 3887,4343 v1(3887,4071)
NetMega2560_49: Mega2560.49 R4LORA.2 | length 4724.2
  Top Layer w20: R4LORA.2 2973,1881 2910,1818 2910,1650 2974,1586 3581.5,1586 3734.5,1739 3734.5,2490.37 3772.5,2528.37 3772.5,2625.37 3734.5,2663.37 3734.5,4331.57 v1(3751,4348.07)
  Bottom Layer w20: Mega2560.49 3262.5,4437.5 3661.57,4437.5 v1(3751,4348.07)
NetMega2560_A0: Mega2560.A0 NivelHidrico.1 R2.2 | length 4104.4
  Top Layer w25: v1(1290,3792) 1290,3758 1525,3523 v1(1525,2934) ; v1(1958,2577) 2499,2577 v1(2548,2528)
  Bottom Layer w20: NivelHidrico.1 1250,3940 1290,3900 v1(1290,3792) 1425,3927 R2.2 ; 2601,2475 Mega2560.A0
  Bottom Layer w25: v1(1525,2934) 1638.5,3047.5 1865.5,3047.5 1958,2955 v1(1958,2577) ; v1(2548,2528) 2601,2475
NetMega2560_A1: Mega2560.A1 R6SR.1 U1SR.7 | length 5566.8
  Top Layer w20: R6SR.1 1725,4830 2000,4830 2039,4869 2039,5196 2490,5647 2626,5647 2673,5600 2673,5527 2740,5460 2855,5460 2915,5400 2915,5036 3063,4888 3063,4800 3258,4605 3420,4605 3525,4500 3525,3615 3399,3489 v1(3399,2677)
  Bottom Layer w20: R6SR.1 1725,4950 1775,5000 U1SR.7 ; v1(3399,2677) 3501,2575 Mega2560.A1
NetMega2560_A2: Mega2560.A2 R6PH.1 U1PH.7 | length 3224.4
  Top Layer w20: R6PH.1 3425,5105 3683,4847 3683,3300 3651,3268 3535,3268 3467,3200 v1(3467,2808)
  Bottom Layer w20: v1(3467,2808) Mega2560.A2
  Bottom Layer w25: U1PH.7 3425,5245 R6PH.1
NetMega2560_A3: Mega2560.A3 R6H.1 U1H.7 | length 3343.8
  Top Layer w20: v1(4464,3520) 4582,3638 v1(4582,3836)
  Bottom Layer w20: Mega2560.A3 3857,3032 3857,3103.64 3987,3233.64 3987,3353 4154,3520 v1(4464,3520) ; v1(4582,3836) 4656,3910 4800,3910 4873,3983 4873,4922 4810,4985 4775,4985 ; U1H.7 4775,4985 ; R6H.1 4810,5020 4775,4985
NetMega2560_A5: Mega2560.A5 RadiacionViejo.3 | length 2106.3
  Top Layer w20: v1(4104,4010) v1(4620,4010)
  Bottom Layer w20: Mega2560.A5 3482,3093 3482,3200 3532,3250 3592,3250 3866.85,3524.85 3866.85,3625 3896.35,3654.5 3996.5,3654.5 4104,3762 v1(4104,4010) ; v1(4620,4010) RadiacionViejo.3
NetMega2560_A6: Mega2560.A6 RadiacionViejo.4 | length 1983.1
  Top Layer w20: v1(3948,3587) 3948,3921.5 3999.5,3973 3999.5,4051.5 4085,4137 v1(4584,4137)
  Bottom Layer w20: Mega2560.A6 3803.16,3278.16 3803.16,3393.08 3948,3537.92 v1(3948,3587) ; v1(4584,4137) 4657,4210 RadiacionViejo.4
NetMega2560_A12: Mega2560.A12 PULSADOR.4 R6.2 | length 1587.9
  Bottom Layer w20: R6.2 2904,2795 2949,2840 PULSADOR.4 3300,2840 3437,2977 3437,3247 3527,3337 3527,3702 Mega2560.A12
NetMega2560_A13: Mega2560.A13 PULSADOR.3 R7.2 | length 1539.1
  Bottom Layer w20: R7.2 2935,2925 2950,2940 PULSADOR.3 3210,2940 3332,3062 3332,3228 3487,3383 3487,3789.89 3572.11,3875 Mega2560.A13
NetMega2560_A14: Mega2560.A14 PULSADOR.2 R8.2 | length 1504.8
  Bottom Layer w20: R8.2 2945,3050 2955,3040 PULSADOR.2 3200,3040 3253,3093 3253,3222.07 3447,3416.07 3447,3822 Mega2560.A14
NetMega2560_A15: Mega2560.A15 PULSADOR.1 R9.2 | length 1551.2
  Bottom Layer w20: R9.2 2955,3170 2985,3140 PULSADOR.1 3407,3437 3407,4037 3445,4075 Mega2560.A15
NetMega2560_GNDs: Mega2560.GNDs RTC.4 | length 607.4
  Bottom Layer w25: RTC.4 1670,1545 Mega2560.GNDs
NetMega2560_SCL: Mega2560.SCL RTC.1 | length 607.4
  Bottom Layer w25: RTC.1 1670,1245 Mega2560.SCL
NetMega2560_SDA: Mega2560.SDA RTC.2 | length 607.4
  Bottom Layer w25: RTC.2 1670,1345 Mega2560.SDA
NetR5H_2: R5H.2 R6H.2 U1H.6 | length 920.1
  Top Layer w20: R5H.2 4700,4470 4810,4580 R6H.2
  Bottom Layer w20: U1H.6 4775,4885 4810,4850 R6H.2
NetR5PH_2: R5PH.2 R6PH.2 U1PH.6 | length 665.2
  Bottom Layer w20: R5PH.2 3398,4845 3425,4872 R6PH.2
  Bottom Layer w25: U1PH.6 3200,5145 3232,5113 3232,4978 3275,4935 R5PH.2
NetR5SR_2: R5SR.2 R6SR.2 U1SR.6 | length 1569.8
  Top Layer w20: R6SR.2 1725,5103 1662,5040 1662,4536.6 1757.99,4440.62 1975.62,4440.62 2085,4550 R5SR.2
  Bottom Layer w25: R6SR.2 1815,5100 U1SR.6
NetR8H_1: R8H.1 R10H.2 Ref1H.1 | length 1326.8
  Top Layer w20: R8H.1 3915,5260 3975,5200 3975,4670 4040,4605 R10H.2
  Bottom Layer w20: Ref1H.1 3775,5260 R8H.1
SGND: Anemometro.2 BT.2 C1H.1 C1PH.1 C1SR.1 C2H.1 C2PH.1 C2SR.1 ComandoRele.4 ConSensorH.3 Contraste.2 DHT22.4 Ds18B20.2 HumedadTierra.3 LCD.1 LCD.5 LCD.16 NivelHidrico.2 Pluviometro.2 R5H.1 R5PH.1 R5SR.1 R6.1 R7.1 R7H.1 R7PH.1 R7SR.1 R8.1 R9.1 R10H.1 RadiacionViejo.2 Ref1H.2 Ref1PH.2 Ref1SR.2 Serial2.3 U1H.4 U1PH.4 U1SR.4 | length 21276.9
  Top Layer w20: R5SR.1 2028,4550 2078,4600 2078,4708 2092,4722 ; R7SR.1 2092,4722 ; v1(1995,3490) 2314,3490 2480,3324 2480,3170 R9.1 2690,3170 2775,3255 v1(2842,3255) ; C1PH.1 2200,4830 2092,4722 ; R7PH.1 2530,5096 2466,5160 2466,5396 2570,5500 Ref1PH.2 ; C2PH.1 3003.35,4800 3238.35,4565 3265,4565 3485,4345 3485,3900 3450,3865 3275,3865 ; Contraste.2 3275,3865 ; v1(3307,3499) 3307,3833 3275,3865 ; C1H.1 3770,4525 3745,4550 3745,4745 3825,4825 Ref1H.2 ; R10H.1 4445,4605 4445,5236 4601,5392 4601,5474 4550,5525 C2H.1
  Top Layer w25: C1PH.1 2530,4830 R7PH.1 ; R6.1 R7.1 2490,2982 2500,2992 R8.1 R9.1
  Bottom Layer w20: Ds18B20.2 1214.5,2885 ; Pluviometro.2 1231,3430 1261,3400 1261,3200 1395.25,3065.75 ; DHT22.4 1155,2825.5 1214.5,2885 ; NivelHidrico.2 1248,4140 1248,4583 1362,4697 1525,4697 1570,4652 C2SR.1 ; C1SR.1 1323,5420 ; BT.2 1350,3370 1287,3307 1287,3200 1394.5,3092.5 1422,3092.5 ; Ref1SR.2 1490,5425 1465,5400 1348.71,5400 ; v1(1995,3490) 1995,3610 LCD.16 ; U1SR.4 2138,5200 1988,5350 1413,5350 1348.71,5400 ; C1PH.1 2607,4830 2637,4800 C2PH.1 2855,4800 2900,4845 R5PH.1 3100,4845 3197,4728 3471,4728 3471,4525 ; R7.1 2287,2925 2247,2965 Serial2.3 2020.5,2965 1893,3092.5 1422,3092.5 ; LCD.5 2735,3950 3013,3950 ; LCD.1 3025.5,3785 3050,3809.5 3050,3913 3013,3950 ; ComandoRele.4 2815,4525 3471,4525 ; v1(2842,3255) 3086,3499 v1(3307,3499) ; Contraste.2 3111,3865 3026,3950 3013,3950 ; ConSensorH.3 3810,5482 4346,5482 4389,5525 C2H.1 ; U1H.4 4153,4785 4144,4776 4000,4632 ; HumedadTierra.3 4455.33,3830 4517,3768.33 4642,3768.33 4683.67,3810 RadiacionViejo.2 ; R10H.1 4297,4605 4292.5,4609.5 4246.6,4609.5 4212.1,4575 4212.1,4482.1 4200,4470 R5H.1 4050,4470 4000,4520 4000,4632 ; 1214.5,2885 1395.25,3065.75 ; 1323,5420 1348.71,5400 ; 1323,5420 1343,5400 1348.71,5400 ; 1395.25,3065.75 1422,3092.5 ; 3471,4525 C1H.1 3893,4525 4000,4632
  Bottom Layer w25: C1SR.1 1155,5420 Anemometro.2 1248,4660 1248,4583 ; C2SR.1 1570,4550 R5SR.1 ; R7PH.1 2565,5045 U1PH.4 ; R5H.1 4110,4140 4172,4078 4172,3911 4253,3830 HumedadTierra.3 ; R7H.1 4110,4785 4153,4785
SGNDSD: IC2SD.7 SD.1 | length 1118.7
  Bottom Layer w20: SD.1 4055,3238 3902.5,3085.5 3902.5,2748.05 4051,2599.55 4051,2380 IC2SD.7
VCC: ComandoRele.1 Contraste.1 DHT22.1 HumedadTierra.4 LCD.2 PULSADOR.5 R1.1 R2.1 R3.1 R5.1 R9H.2 R9PH.2 R9SR.2 RTC.3 U1H.8 U1PH.8 U1SR.8 | length 17568.3
  Top Layer w20: R1.1 1375,1865 1450,1940 1467.5,1940 1527.5,2000 1527.5,2102.5 1500,2130 R3.1 1500,2235 1590,2325 1590,3015 ; R2.1 1425,3688 1590,3523 1590,3015 ; R5.1 1499,3995 1454,3950 1370,3950 1362,3958 1362,4949 1400,4987 1550,4987 1580,4957 R9SR.2 ; v1(3215,2740) v1@3196.23,2758.77 ; Contraste.1 3196.23,3665 v1@3196.23,2758.77 ; 1590,3015 1650,3075 1835,3075 2175,2735 2505,2735 3068,2172 3068,1658 3100,1626 3176,1626 3207,1657 3207,2104 3343,2240 3343,2457 3196.23,2603.77 v1@3196.23,2758.77
  Top Layer w25: 1370,3950 1425,3895 R2.1 ; v1(1375,1445) R1.1 ; R9PH.2 3543,5360 3928,4975 3928,4656 4042,4542 v1(4280,4542)
  Bottom Layer w20: DHT22.1 1350,1895 1375,1870 R1.1 ; R9SR.2 1606,4777 1935,4777 ; U1SR.8 1862,4900 1862,4850 1935,4777 ; ComandoRele.1 2515,4600 2482,4633 2450,4633 2399,4684 2399,4850 ; LCD.2 2805,3650 2864,3650 2879,3665 Contraste.1 ; PULSADOR.5 v1(3215,2740) ; U1PH.8 3295,5345 R9PH.2 3295,5493 3105,5683 2544,5683 2399,5538 2399,4850 ; HumedadTierra.4 4400,3930 4516,4046 4516,5201 R9H.2 ; 1935,4777 2326,4777 2399,4850
  Bottom Layer w25: RTC.3 v1(1375,1445) ; v1(4280,4542) 4280,3930 HumedadTierra.4 ; R9H.2 4575,5085 U1H.8
VCCSD: IC2SD.14 SD.2 | length 474
  Bottom Layer w20: SD.2 4155,3178 4353,2980 IC2SD.14
pads on no net: DHT22.3 IC2SD.5 IC2SD.6 LCD.7 LCD.8 LCD.9 LCD.10 Lora.2 Lora.3 Lora.6 Lora.7 Lora.8 Lora.9 Lora.13 Lora.14 Lora.15 Lora.16 Lora.19 Lora.20 Mega2560.0 Mega2560.1 Mega2560.3 Mega2560.4 Mega2560.5V Mega2560.7 Mega2560.8 Mega2560.12 Mega2560.13 Mega2560.20 Mega2560.21 Mega2560.23 Mega2560.25 Mega2560.27 Mega2560.29 Mega2560.31 Mega2560.33 Mega2560.34 Mega2560.35 Mega2560.36 Mega2560.37 Mega2560.38 Mega2560.40 Mega2560.41 Mega2560.42 Mega2560.44 Mega2560.45 Mega2560.46 Mega2560.48 Mega2560.A7 Mega2560.A8 Mega2560.A9 Mega2560.A10 Mega2560.A11 Mega2560.AREF Mega2560.GNDa Mega2560.GNDb Mega2560.GNDc Mega2560.GNDd Mega2560.RESET Mega2560.VCCa Mega2560.VCCb Mega2560.VIN

## Polygon pours and split planes (outlines as drawn)
no net on Top Layer "Top Layer-No Net" (solid, pour order 8): 1000,5724 4931,5724 4937,5730 4937,1000 1000,1000
no net on Bottom Layer "Top Layer-No Net" (solid, pour order 12): 4945,995 1005,995 1000,1000 1000,5724 4937,5724

## Keep-outs
Top Layer:
  rectangle: 1055,1185 1155,1585
  rectangle: 1060,1805 1250,2590
  rectangle: 1660,4130 3455,4315
  rectangle: 1645,3130 1750,3920
  rectangle: 1645,2225 1745,3020
  rectangle: 1640,1175 1750,2165
  rectangle: 3555,3325 3650,4115
  rectangle: 3570,2440 3650,3210
  rectangle: 3560,1730 3645,2320
  rectangle: 1985,3610 2850,3865
  rectangle: 4005,3235 4605,3340
  rectangle: 3050,2685 3160,3190
  rectangle: 1370,3120 1480,3515
  region: 2870,4490 2870,4585 2460,4585 2460,4490
  rectangle: 4285,3575 4390,3975
  lines w10: 1000,5724 1000,1000 4937,1000 4937,5724
Bottom Layer:
  rectangle: 1330,2725 1530,2825
Multi-Layer:
  lines w10: 1000,5724 4937,5724

## Other copper
Top Layer:
  text "UADER - IDTILAB" at 1170,1045 h60
Bottom Layer:
  text "UADER - IDTILAB" at 2040,1050 h60

## Text inside footprints (layer, text, board x,y; h text height)
C1H: Top Overlay "+" at 3855,4420 h60 r90
C1PH: Top Overlay "+" at 2455,4935 h60 r270
C1SR: Top Overlay "+" at 1210,5525 h60 r270
C2H: Top Overlay "+" at 4455,5630 h60 r270
C2PH: Top Overlay "+" at 2760,4905 h60 r270
C2SR: Top Overlay "+" at 1675,4625 h60 r180
LCD: Top Overlay "2" at 2865,3670 h60 r270; Top Overlay "1" at 2865,3845 h60 r270; Top Overlay "15" at 1915,3860 h60 r270; Top Overlay "16" at 1915,3700 h60 r270
Ref1H: Top Overlay "1" at 3747.09,4769.69 h59.05 r270; Top Overlay "3" at 3843.39,4769.69 h59.05 r270
Ref1PH: Top Overlay "1" at 2492.09,5459.69 h59.05 r270; Top Overlay "3" at 2588.39,5459.69 h59.05 r270
Ref1SR: Top Overlay "1" at 1412.09,5374.69 h59.05 r270; Top Overlay "3" at 1508.39,5374.69 h59.05 r270